# EAGLE board TugasAkhir (EAGLE 9.6.2)
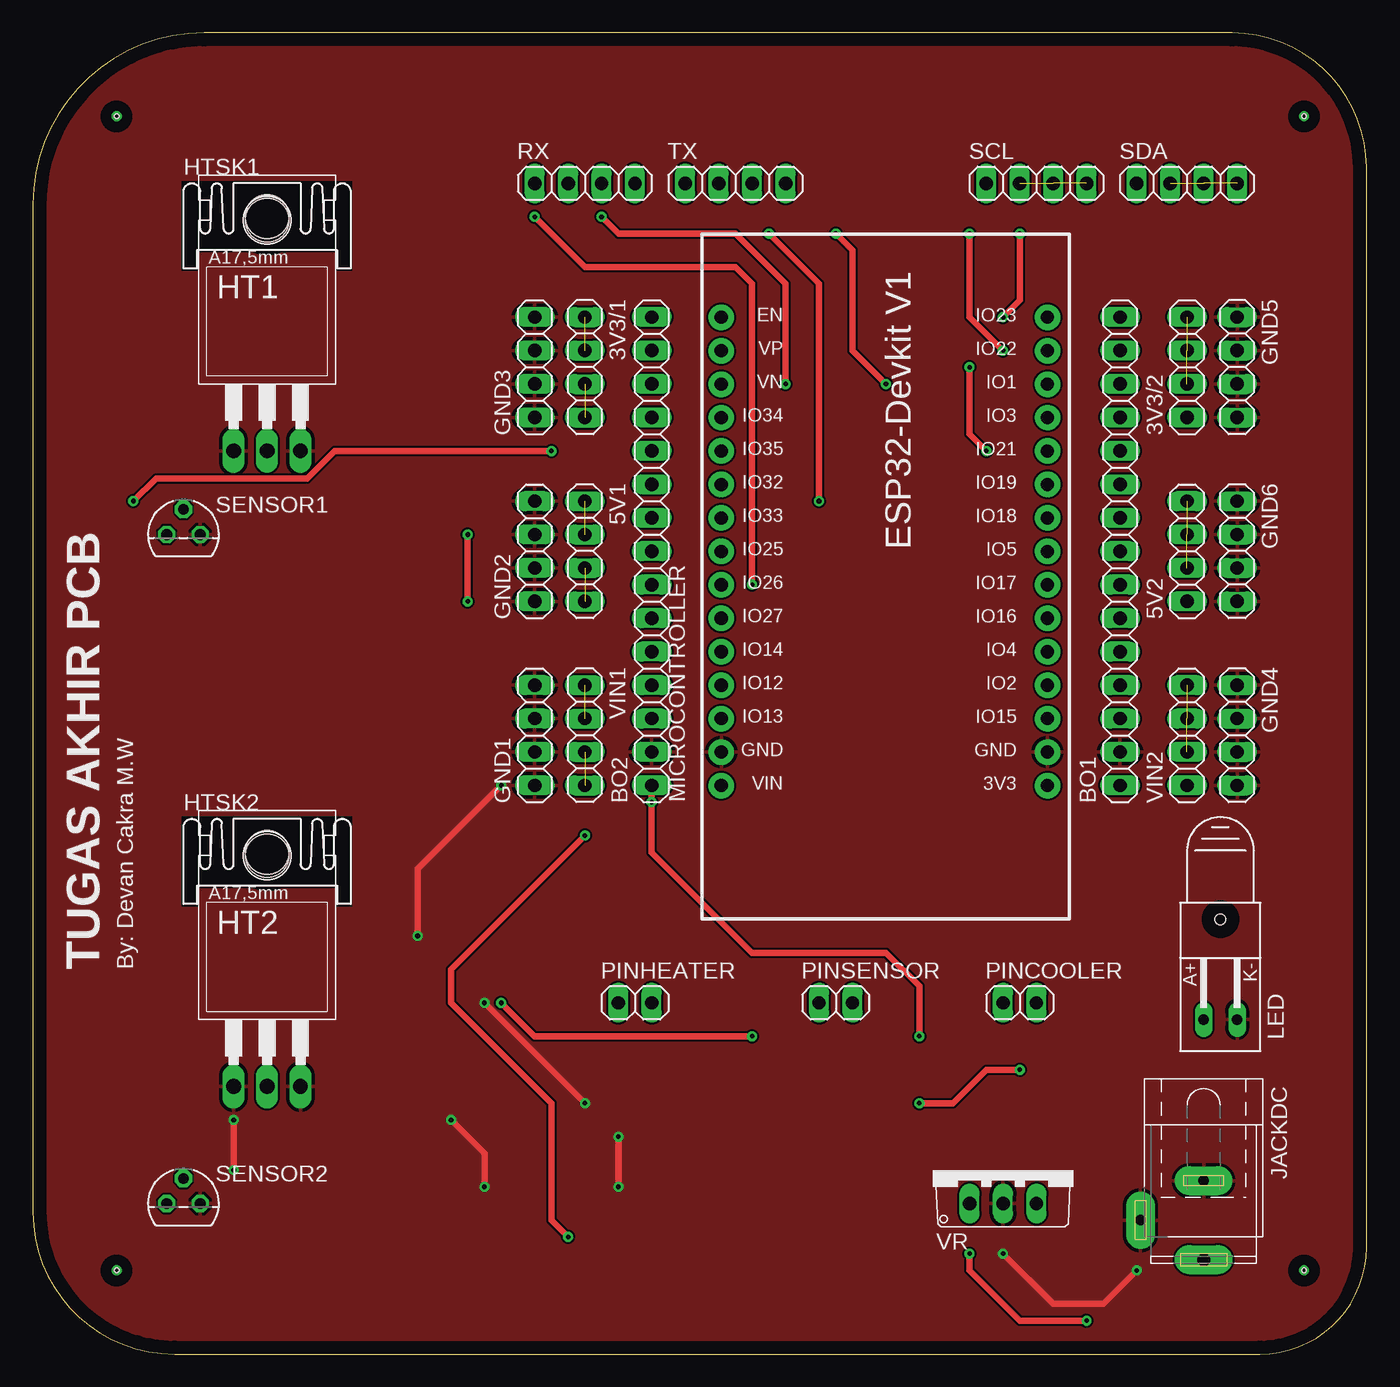
[diagram p0: board, top side]
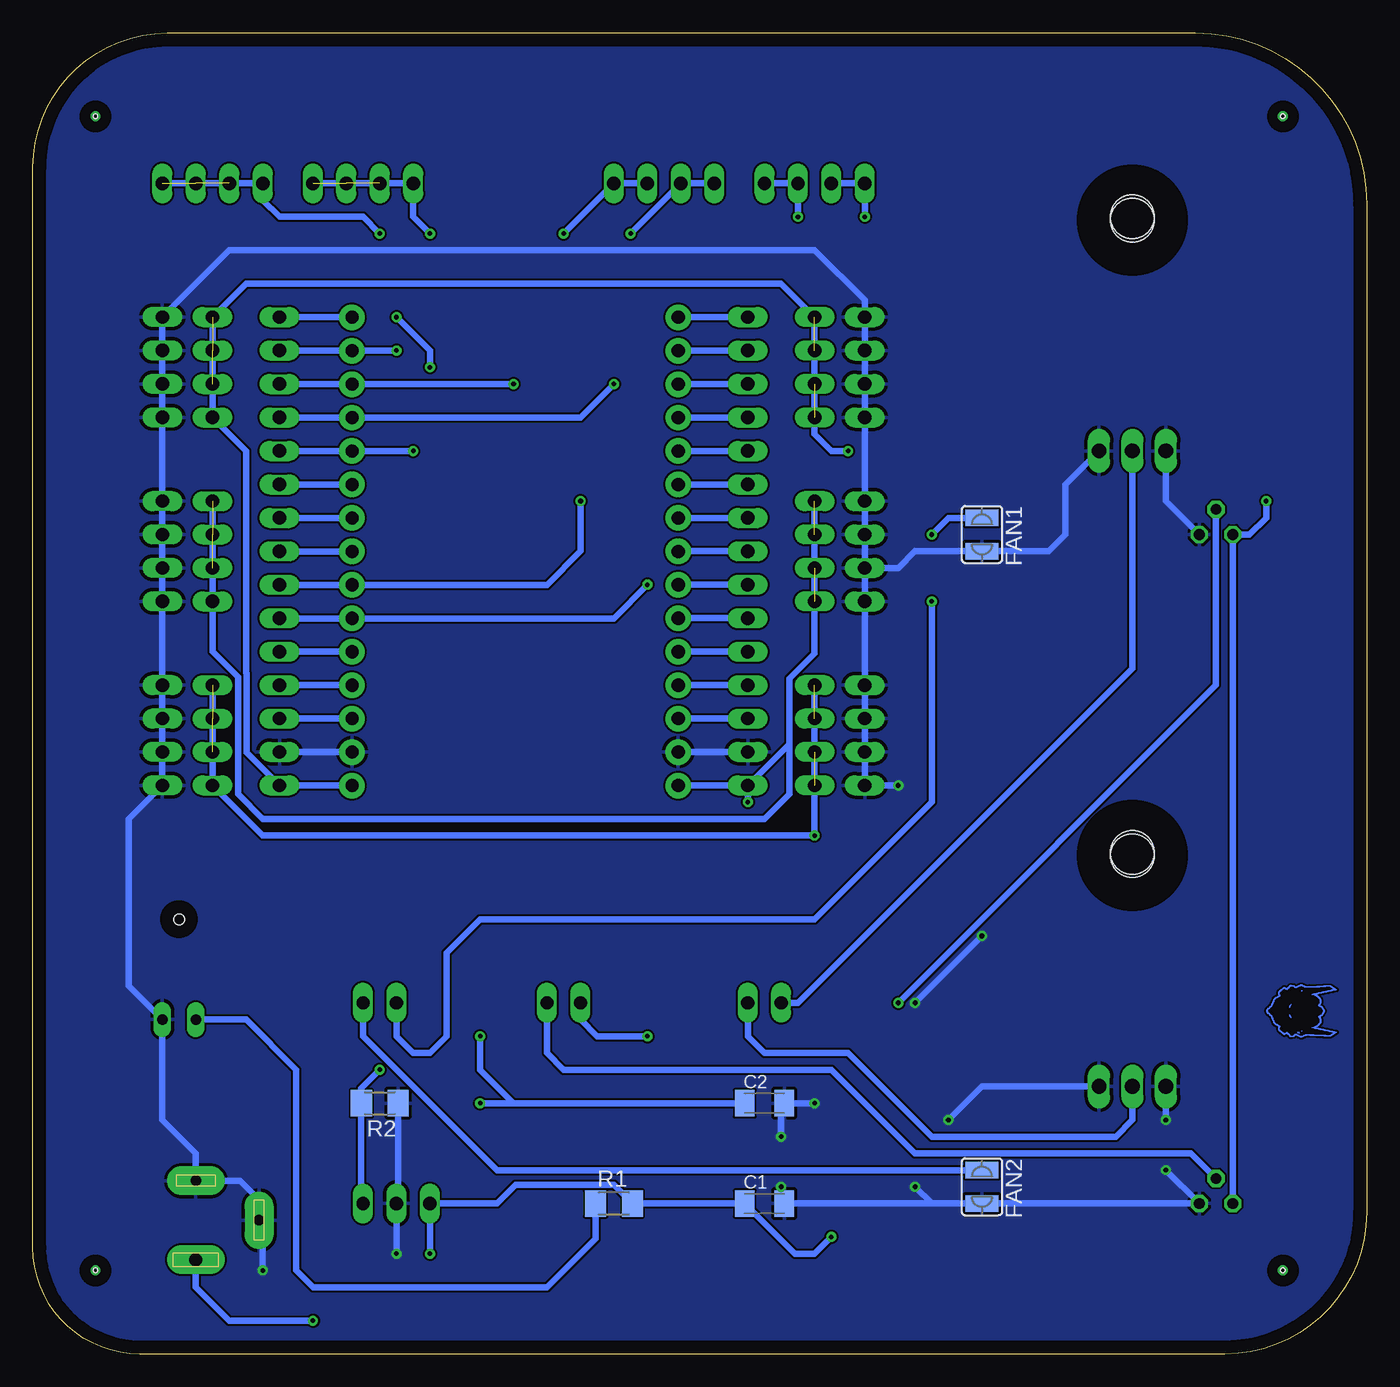
[diagram p1: board, bottom side, seen from below]

Size 101.27 x 100.32 mm. Coordinates in mm from the lower left corner, seen from the top.
Outline: 91.06,100.32 12.99,100.32 arc90 0,87.33 0,10.75 arc90 10.75,0 93.17,0 arc90 101.27,8.1 101.27,90.11 arc90 91.06,100.32
Copper layers (1*16): Top 0.035mm / dielectric 1.5mm / Bottom 0.035mm
Design rules "default": minimum track width 6mil, minimum drill 0.35mm, track to track 6mil, track to pad 6mil, pad to pad 6mil, via to via 6mil, smd to smd 6mil, copper to edge 40mil, drill to drill 6mil, minimum pad ring 10mil, minimum via ring 8mil, stop-mask expansion 4mil, vias tented up to drill 0mil, thermal gap 10mil
Holes 0.35 mm at 6.35,6.35 96.52,6.35 96.52,93.98 6.35,93.98

## Footprints (pad centres in the part's own frame; a part is rotated, then mirrored left to right if it is on the bottom)
1X04 = drill 1.016 long: 1 -3.81,0; 2 -1.27,0; 3 1.27,0; 4 3.81,0
1X15 = drill 1.016 long: 1 -17.78,0; 2 -15.24,0; 3 -12.7,0; 4 -10.16,0; 5 -7.62,0; 6 -5.08,0; 7 -2.54,0; 8 0,0; 9 2.54,0; 10 5.08,0; 11 7.62,0; 12 10.16,0; 13 12.7,0; 14 15.24,0; 15 17.78,0
C1206K = smd 1.5 x 2: 1 -1.5,0; 2 1.5,0
SJW = smd 1.27 x 2.54: 1 -1.27,0; 2 1.27,0
TO220 = drill 1.118 long: 1 -2.54,-6.35; 2 0,-6.35; 3 2.54,-6.35 | hole 3.302: 0,11.176
SK95-2M3 = hole 3.302: 0,2.54
SPC4078 = drill 0.8 pad 2.184 long: 1 -3,0; 2 0,-4.8 | drill 1 pad 2.184 long: 3 3,0
Q62902-B155 = drill 0.813 long: A 7.62,-1.27; K 7.62,1.27 | hole 0.813: 0,0
ESP32-DEVKITV1 = drill 1 pad 1.93: 1 -22.87,-13.54; 2 -20.33,-13.54; 3 -17.79,-13.54; 4 -15.25,-13.54; 5 -12.71,-13.54; 6 -10.17,-13.54; 7 -7.63,-13.54; 8 -5.09,-13.54; 9 -2.55,-13.54; 10 -0.01,-13.54; 11 2.53,-13.54; 12 5.07,-13.54; 13 7.61,-13.54; 14 10.15,-13.54; 15 12.69,-13.54; 16 12.69,11.23; 17 10.15,11.23; 18 7.61,11.23; 19 5.07,11.23; 20 2.53,11.23; 21 -0.01,11.23; 22 -2.55,11.23; 23 -5.09,11.23; 24 -7.63,11.23; 25 -10.17,11.23; 26 -12.71,11.23; 27 -15.25,11.23; 28 -17.79,11.23; 29 -20.33,11.23; 30 -22.87,11.23
1X02 = drill 1.016 long: 1 -1.27,0; 2 1.27,0
M1206 = smd 1.6 x 2: 1 -1.4,0; 2 1.4,0
TO92 = drill 0.813 octagon: 1 -1.27,0; 2 0,1.905; 3 1.27,0
TO220V = drill 1.016 long: 1 -2.54,-2.54; 2 0,-2.54; 3 2.54,-2.54

## Placement (x,y rotation side)
3V3/1  [1X04]  41.91,74.93 270 top
3V3/2  [1X04]  87.63,74.93 90 top
5V1  [1X04]  41.91,60.96 270 top
5V2  [1X04]  87.63,60.96 90 top
BO1  [1X15]  82.55,60.96 90 top
BO2  [1X15]  46.99,60.96 90 top
C1  10uF 16V  [C1206K]  45.72,11.43 0 bottom
C2  10uF 16V  [C1206K]  45.72,19.05 0 bottom
FAN1  [SJW]  29.21,62.23 270 bottom
FAN2  [SJW]  29.21,12.7 270 bottom
GND1  [1X04]  38.1,46.99 90 top
GND2  [1X04]  38.1,60.96 90 top
GND3  [1X04]  38.1,74.93 90 top
GND4  [1X04]  91.44,46.99 270 top
GND5  [1X04]  91.44,74.93 270 top
GND6  [1X04]  91.44,60.96 270 top
HT1  TIP31C  [TO220]  17.78,74.93 0 top
HT2  TIP31C  [TO220]  17.78,26.67 0 top
HTSK1  SK95-2M3  [SK95-2M3]  17.78,83.82 0 top
HTSK2  SK95-2M3  [SK95-2M3]  17.78,35.56 0 top
JACKDC  [SPC4078]  88.9,10.16 270 top
LED  [Q62902-B155]  90.17,33.02 270 top
MICROCONTROLLER  ESP32DEVKITV1  [ESP32-DEVKITV1]  63.5,66.04 90 top
PINCOOLER  [1X02]  74.93,26.67 0 top
PINHEATER  [1X02]  45.72,26.67 0 top
PINSENSOR  [1X02]  60.96,26.67 0 top
R1  10K 1/4W  [M1206]  57.15,11.43 0 bottom
R2  240 1/4W  [M1206]  74.93,19.05 180 bottom
RX  [1X04]  41.91,88.9 0 top
SCL  [1X04]  76.2,88.9 0 top
SDA  [1X04]  87.63,88.9 0 top
SENSOR1  LM35CZ  [TO92]  11.43,62.23 0 top
SENSOR2  LM35CZ  [TO92]  11.43,11.43 0 top
TX  [1X04]  53.34,88.9 0 top
VIN1  [1X04]  41.91,46.99 270 top
VIN2  [1X04]  87.63,46.99 90 top
VR  7805TV  [TO220V]  73.66,13.97 0 top

## Library data of the parts
3V3/1 3V3/2 5V1 5V2 BO1 BO2 GND1-GND6 PINCOOLER PINHEATER PINSENSOR RX SCL SDA TX VIN1 VIN2 = pinhead
C1 C2 = rcl; SPICEPREFIX: C
FAN1 FAN2 = jumper
HT1 HT2 = transistor-npn
HTSK1 HTSK2 = heatsink
JACKDC = con-jack; OC_FARNELL: unknown; OC_NEWARK: unknown
LED = led
MICROCONTROLLER = ESP32-DEVKITV1
R1 R2 = rcl; SPICEPREFIX: R
SENSOR1 SENSOR2 = lm35
VR = linear

## Nets
3V3: 3V3/1.1 3V3/1.2 3V3/1.3 3V3/1.4 3V3/2.1 3V3/2.2 3V3/2.3 3V3/2.4 BO1.1 MICROCONTROLLER.1 SENSOR1.1 SENSOR2.1
D2: BO1.4 MICROCONTROLLER.4
D4: BO1.5 MICROCONTROLLER.5
D5: BO1.8 MICROCONTROLLER.8
D12: BO2.4 MICROCONTROLLER.27
D13: BO2.3 MICROCONTROLLER.28
D14: BO2.5 MICROCONTROLLER.26
D15: BO1.3 MICROCONTROLLER.3
D18: BO1.9 MICROCONTROLLER.9
D19: BO1.10 MICROCONTROLLER.10
D21: BO1.11 MICROCONTROLLER.11 SDA.1 SDA.2 SDA.3 SDA.4
D22: BO1.14 MICROCONTROLLER.14 SCL.1 SCL.2 SCL.3 SCL.4
D23: BO1.15 MICROCONTROLLER.15
D25: BO2.8 MICROCONTROLLER.23
D26: BO2.7 MICROCONTROLLER.24
D27: BO2.6 MICROCONTROLLER.25
D32: BO2.10 MICROCONTROLLER.21
D33: BO2.9 MICROCONTROLLER.22
D34: BO2.12 MICROCONTROLLER.19
D35: BO2.11 MICROCONTROLLER.20
EN: BO2.15 MICROCONTROLLER.16
GND: BO1.2 BO2.2 C1.2 C2.2 FAN1.2 FAN2.2 GND1.1 GND1.2 GND1.3 GND1.4 GND2.1 GND2.2 GND2.3 GND2.4 GND3.1 GND3.2 GND3.3 GND3.4 GND4.1 GND4.2 GND4.3 GND4.4 GND5.1 GND5.2 GND5.3 GND5.4 GND6.1 GND6.2 GND6.3 GND6.4 HT1.1 HT1.3 HT2.1 HT2.3 JACKDC.1 JACKDC.2 LED.K MICROCONTROLLER.2 MICROCONTROLLER.29 R2.1 SENSOR1.3 SENSOR2.3 VR.2
INF1: FAN1.1 PINCOOLER.1
INF2: FAN2.1 PINCOOLER.2
INH1: HT1.2 PINHEATER.1
INH2: HT2.2 PINHEATER.2
INL1: PINSENSOR.1 SENSOR1.2
INL2: PINSENSOR.2 SENSOR2.2
RX0: BO1.12 MICROCONTROLLER.12 RX.3 RX.4
RX2: BO1.6 MICROCONTROLLER.6 RX.1 RX.2
TX0: BO1.13 MICROCONTROLLER.13 TX.3 TX.4
TX2: BO1.7 MICROCONTROLLER.7 TX.1 TX.2
VCC: 5V1.1 5V1.2 5V1.3 5V1.4 5V2.1 5V2.2 5V2.3 5V2.4 BO2.1 C2.1 MICROCONTROLLER.30 R2.2 VR.3
VIN: C1.1 JACKDC.3 R1.2 VIN1.1 VIN1.2 VIN1.3 VIN1.4 VIN2.1 VIN2.2 VIN2.3 VIN2.4 VR.1
VN: BO2.13 MICROCONTROLLER.18
VOUT: LED.A R1.1
VP: BO2.14 MICROCONTROLLER.17

## Tracks (layer width: path | path; a pad name or v marks a point on that pad's centre or on a via)
3V3  (via drill 0.35)  (4 unrouted)
  Top 0.508: v7.62,64.77 9.35,66.5 20.84,66.5 22.92,68.58 v39.37,68.58
  Bottom 0.508: MICROCONTROLLER.1 BO1.1 85.04,45.67 85.04,51.68 85.09,51.73 85.09,68.58 3V3/2.1 3V3/2.4 85.09,81.28 44.45,81.28 3V3/1.1 3V3/1.4 41.91,69.85 40.64,68.58 v39.37,68.58 | SENSOR2.1 SENSOR1.1 8.89,62.23 7.62,63.5 v7.62,64.77
D2
  Bottom 0.508: MICROCONTROLLER.4 BO1.4
D4
  Bottom 0.508: MICROCONTROLLER.5 BO1.5
D5
  Bottom 0.508: MICROCONTROLLER.8 BO1.8
D12
  Bottom 0.508: BO2.4 MICROCONTROLLER.27
D13
  Bottom 0.508: BO2.3 MICROCONTROLLER.28
D14
  Bottom 0.508: BO2.5 MICROCONTROLLER.26
D15
  Bottom 0.508: MICROCONTROLLER.3 BO1.3
D18
  Bottom 0.508: MICROCONTROLLER.9 BO1.9
D19
  Bottom 0.508: MICROCONTROLLER.10 BO1.10
D21  (via drill 0.35)  (2 unrouted)
  Top 0.508: v74.93,85.09 74.93,80.01 v73.66,78.74 | v71.12,74.93 71.12,69.85 v72.39,68.58
  Bottom 0.508: SDA.4 SDA.1 83.82,87.63 82.55,86.36 76.2,86.36 v74.93,85.09 | BO1.11 MICROCONTROLLER.11 v72.39,68.58 | v73.66,78.74 71.12,76.2 v71.12,74.93
D22  (via drill 0.35)  (2 unrouted)
  Top 0.508: v71.12,85.09 71.12,78.74 v73.66,76.2
  Bottom 0.508: SCL.4 SCL.1 72.39,86.36 v71.12,85.09 | BO1.14 MICROCONTROLLER.14 v73.66,76.2
D23
  Bottom 0.508: MICROCONTROLLER.15 BO1.15
D25
  Bottom 0.508: BO2.8 MICROCONTROLLER.23
D26
  Bottom 0.508: BO2.7 MICROCONTROLLER.24
D27
  Bottom 0.508: BO2.6 MICROCONTROLLER.25
D32
  Bottom 0.508: BO2.10 MICROCONTROLLER.21
D33
  Bottom 0.508: BO2.9 MICROCONTROLLER.22
D34
  Bottom 0.508: BO2.12 MICROCONTROLLER.19
D35
  Bottom 0.508: BO2.11 MICROCONTROLLER.20
EN
  Bottom 0.508: BO2.15 MICROCONTROLLER.16
GND  (via drill 0.35)
  Top 0.508: v15.24,13.97 v15.24,17.78 | v31.75,17.78 34.29,15.24 v34.29,12.7 | v44.45,12.7 v44.45,16.51 | v73.66,7.62 77.47,3.81 81.28,3.81 v83.82,6.35 | v41.91,19.05 v34.29,26.67 | v35.56,43.18 29.21,36.83 v29.21,31.75
  Bottom 0.508: BO2.2 MICROCONTROLLER.29 | GND2.2 GND2.4 GND3.1 GND3.4 38.1,80.01 41.91,83.82 86.36,83.82 GND5.1 GND5.4 GND6.1 GND6.4 GND4.1 GND4.4 93.98,40.64 93.98,27.94 LED.K 91.44,17.78 88.9,15.24 JACKDC.1 85.55,13.16 83.82,11.43 83.82,10.44 JACKDC.2 83.82,9.88 v83.82,6.35 | GND2.2 GND2.1 GND1.4 GND1.1 v35.56,43.18 | MICROCONTROLLER.2 BO1.2 | FAN2.2 SENSOR2.3 v15.24,13.97 | v15.24,17.78 HT2.1 | HT2.3 29.21,20.32 v31.75,17.78 | v34.29,12.7 33.02,11.43 FAN2.2 | SENSOR1.3 15.24,64.77 HT1.1 | HT1.3 22.86,66.04 22.86,62.23 24.13,60.96 FAN1.2 34.29,60.96 35.56,59.69 GND2.2 | FAN2.2 C1.2 44.45,11.66 v44.45,12.7 | v44.45,16.51 44.45,18.82 C2.2 v41.91,19.05 | R2.1 73.53,11.56 VR.2 v73.66,7.62 | v34.29,26.67 v29.21,31.75
  pour Bottom (isolate 0.021): 0,87.33 0,10.75 arc90 10.75,0 93.17,0 arc90 101.27,8.1 101.27,90.11 arc90 91.06,100.32 12.99,100.32 arc90
  pour Top (isolate 0.021): 0,87.33 0,10.75 arc90 10.75,0 93.17,0 arc90 101.27,8.1 arc0 101.27,90.11 arc90 91.06,100.32 12.99,100.32 arc90
INF1  (via drill 0.35)
  Top 0.508: v33.02,57.15 v33.02,62.23
  Bottom 0.508: PINCOOLER.1 73.66,24.13 72.39,22.86 71.12,22.86 69.85,24.13 69.85,30.48 67.31,33.02 41.91,33.02 33.02,41.91 v33.02,57.15 | v33.02,62.23 31.75,63.5 FAN1.1
INF2
  Bottom 0.508: PINCOOLER.2 76.2,24.13 66.04,13.97 FAN2.1
INH1
  Bottom 0.508: HT1.2 17.78,52.07 43.18,26.67 PINHEATER.1
INH2
  Bottom 0.508: HT2.2 17.78,17.78 19.05,16.51 33.02,16.51 39.37,22.86 45.72,22.86 46.99,24.13 PINHEATER.2
INL1  (via drill 0.35)
  Top 0.508: v35.56,26.67 38.1,24.13 v54.61,24.13
  Bottom 0.508: SENSOR1.2 11.43,50.8 v35.56,26.67 | v54.61,24.13 58.42,24.13 59.69,25.4 PINSENSOR.1
INL2
  Bottom 0.508: SENSOR2.2 13.34,15.24 34.29,15.24 40.64,21.59 60.96,21.59 62.23,22.86 PINSENSOR.2
N$1  (via drill 0.35)
  other vias: 6.35,93.98
N$2  (via drill 0.35)
  other vias: 96.52,93.98
N$3  (via drill 0.35)
  other vias: 96.52,6.35
N$4  (via drill 0.35)
  other vias: 6.35,6.35
RX0  (via drill 0.35)
  Top 0.508: v43.18,86.36 44.45,85.09 53.34,85.09 57.15,81.28 v57.15,73.66
  Bottom 0.508: RX.4 RX.3 v43.18,86.36 | BO1.12 77.47,71.11 MICROCONTROLLER.12 59.7,71.11 v57.15,73.66
RX2  (via drill 0.35)
  Top 0.508: v54.61,58.42 54.61,81.28 53.34,82.55 41.91,82.55 v38.1,86.36
  Bottom 0.508: RX.2 RX.1 v38.1,86.36 | BO1.6 77.47,55.87 MICROCONTROLLER.6 57.16,55.87 v54.61,58.42
TX0  (via drill 0.35)
  Top 0.508: v60.96,85.09 62.23,83.82 62.23,76.2 v64.77,73.66
  Bottom 0.508: TX.3 TX.4 v60.96,85.09 | BO1.13 MICROCONTROLLER.13 v64.77,73.66
TX2  (via drill 0.35)
  Top 0.508: v55.88,85.09 59.69,81.28 v59.69,64.77
  Bottom 0.508: TX.1 TX.2 v55.88,85.09 | BO1.7 MICROCONTROLLER.7 62.24,58.41 59.69,60.96 v59.69,64.77
VCC  (via drill 0.35)  (4 unrouted)
  Top 0.508: v67.31,19.05 69.85,19.05 72.39,21.59 v74.93,21.59 | BO2.1 46.99,38.1 54.61,30.48 64.77,30.48 67.31,27.94 v67.31,24.13
  Bottom 0.508: BO2.1 MICROCONTROLLER.30 | 5V1.1 5V1.4 41.91,53.21 43.84,51.28 43.84,46.33 | 5V2.4 5V2.1 87.63,53.34 85.7,51.41 85.7,42.52 83.82,40.64 45.72,40.64 43.84,42.52 43.84,46.33 | C2.1 64.77,19.05 | 64.77,19.05 v67.31,19.05 | v74.93,21.59 76.33,20.19 R2.2 76.33,11.56 VR.3 | BO2.1 43.84,46.33 | BO2.1 v46.99,41.91 | v67.31,24.13 67.31,21.59 64.77,19.05
VIN  (via drill 0.35)  (4 unrouted)
  Top 0.508: v40.64,8.89 39.37,10.16 39.37,19.05 31.75,26.67 31.75,29.21 v41.91,39.37 | v80.01,2.54 74.93,2.54 71.12,6.35 v71.12,7.62
  Bottom 0.508: VIN1.1 VIN1.4 v41.91,39.37 83.82,39.37 VIN2.1 VIN2.4 | v40.64,8.89 41.91,7.62 43.41,7.62 C1.1 R1.2 57.16,12.84 64.63,12.84 66.04,11.43 VR.1 v71.12,7.62 | JACKDC.3 88.9,5.08 86.36,2.54 v80.01,2.54
VN
  Bottom 0.508: BO2.13 MICROCONTROLLER.18
VOUT
  Bottom 0.508: LED.A 85.09,25.4 81.28,21.59 81.28,6.35 80.01,5.08 62.23,5.08 58.55,8.76 R1.1
VP
  Bottom 0.508: BO2.14 MICROCONTROLLER.17
(copper drawn outside any net)
  shapes: Bottom area x658

## Text on the board
tNames: TUGAS AKHIR PCB | By: Devan Cakra M.W